# EAGLE board circuitPendulumBrushes (EAGLE 6.6.0)
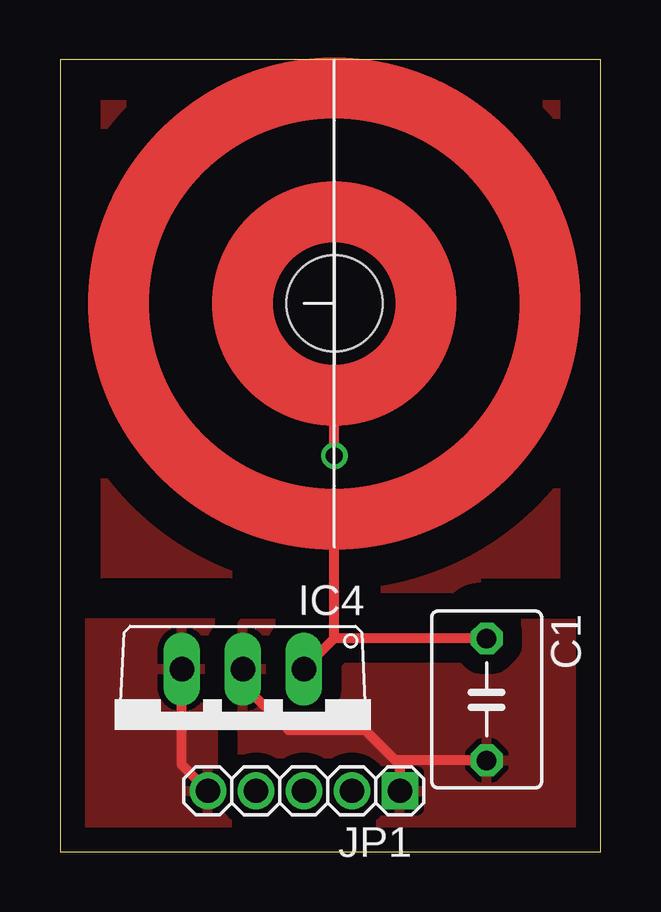
[diagram p0: board, top side]
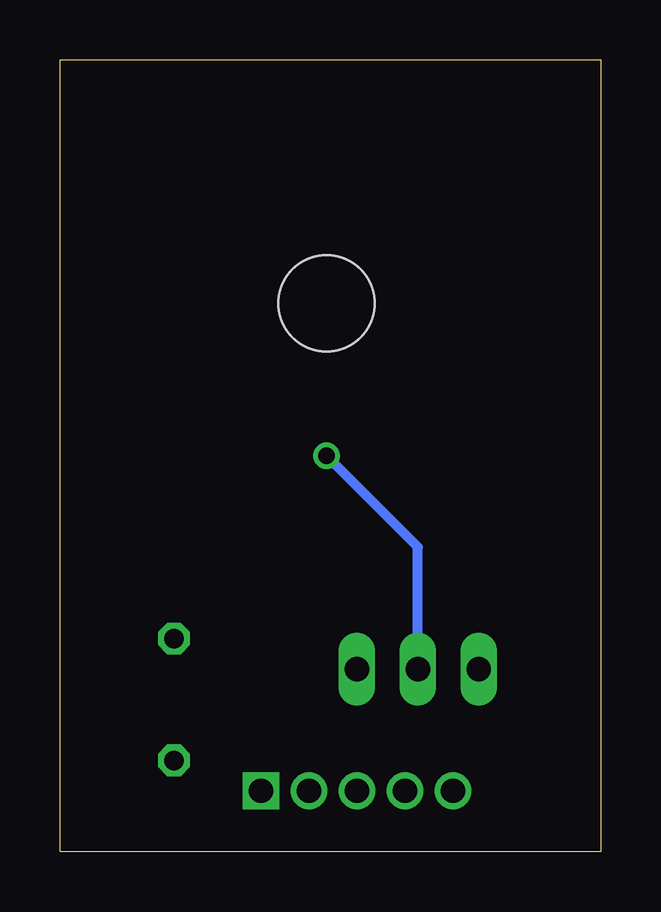
[diagram p1: board, bottom side, seen from below]

Size 22.53 x 33.01 mm. Coordinates in mm from the lower left corner, seen from the top.
Outline: 0,0 22.53,0 22.53,33.01 0,33.01 0,0
Copper layers (1*16): Top 0.035mm / dielectric 1.5mm / Bottom 0.035mm
Design rules "default": minimum track width 10mil, minimum drill 24mil, track to track 8mil, track to pad 8mil, pad to pad 8mil, via to via 8mil, smd to smd 8mil, copper to edge 40mil, drill to drill 8mil, minimum pad ring 10mil, minimum via ring 8mil, stop-mask expansion 4mil, vias tented up to drill 0mil, thermal gap 10mil
Holes 4 mm at 11.43,22.86

## Footprints (pad centres in the part's own frame; a part is rotated, then mirrored left to right if it is on the bottom)
C050-045X075 = drill 0.813 octagon: 1 -2.54,0; 2 2.54,0
TO220V = drill 1.016 long: 1 -2.54,-2.54; 2 0,-2.54; 3 2.54,-2.54
1_05X2MM = drill 1.016 pad 1.3 square: 1 -4,0 | drill 1.016 pad 1.3: 2 0,0; 3 -2,0; 4 2,0; 5 4,0

## Placement (x,y rotation side)
C1  100uF  [C050-045X075]  17.78,6.35 270 top
IC4  786TV  [TO220V]  7.62,5.08 180 top
JP1  Out  [1_05X2MM]  10.16,2.54 180 top

## Library data of the parts
C1 = rcl
IC4 = linear
JP1 = pinhead

## Nets
GND: C1.2 IC4.2 JP1.1
VCC: IC4.3 JP1.5
VIN: C1.1 IC4.1

## Tracks (layer width: path | path; a pad name or v marks a point on that pad's centre or on a via)
GND  (via drill 0.7 pad 0.3)
  Top 0.406: IC4.2 7.62,6.98 9.53,5.08 12.7,5.08 13.97,3.81 | v11.43,16.51 11.43,19.05 | 13.97,3.81 14.16,3.62 JP1.1 | C1.2 13.97,3.81
  Bottom 0.406: IC4.2 7.62,12.7 v11.43,16.51
  pour Top (isolate 0.813): 7.62,9.53 22.86,9.53 22.86,0 7.62,0
TMP
  pour Top (isolate 1.676, rank 3): 0,33.02 22.86,33.02 22.86,10.79 0,10.79
VCC
  Top 0.406: JP1.5 5.08,3.62 IC4.3
  pour Top (isolate 0.813, rank 2): 7.62,9.53 0,9.53 0,0 7.62,0
VIN
  Top 0.406: IC4.1 11.43,8.89 | 11.43,8.89 11.43,13.97 | C1.1 11.43,8.89
(copper drawn outside any net)
  shapes: Top circle x2